# Altium PCB NEw.PcbDoc
Units mil, origin at the board's own origin, x right, y up, seen from the top; angles counter-clockwise.
Board outline 6000 x 4000 mil, 2 copper layers (Top Layer, Bottom Layer); 14 components, 8 nets, 33 pads, 0 vias.
Unrouted connection lines stored in the file: 24.
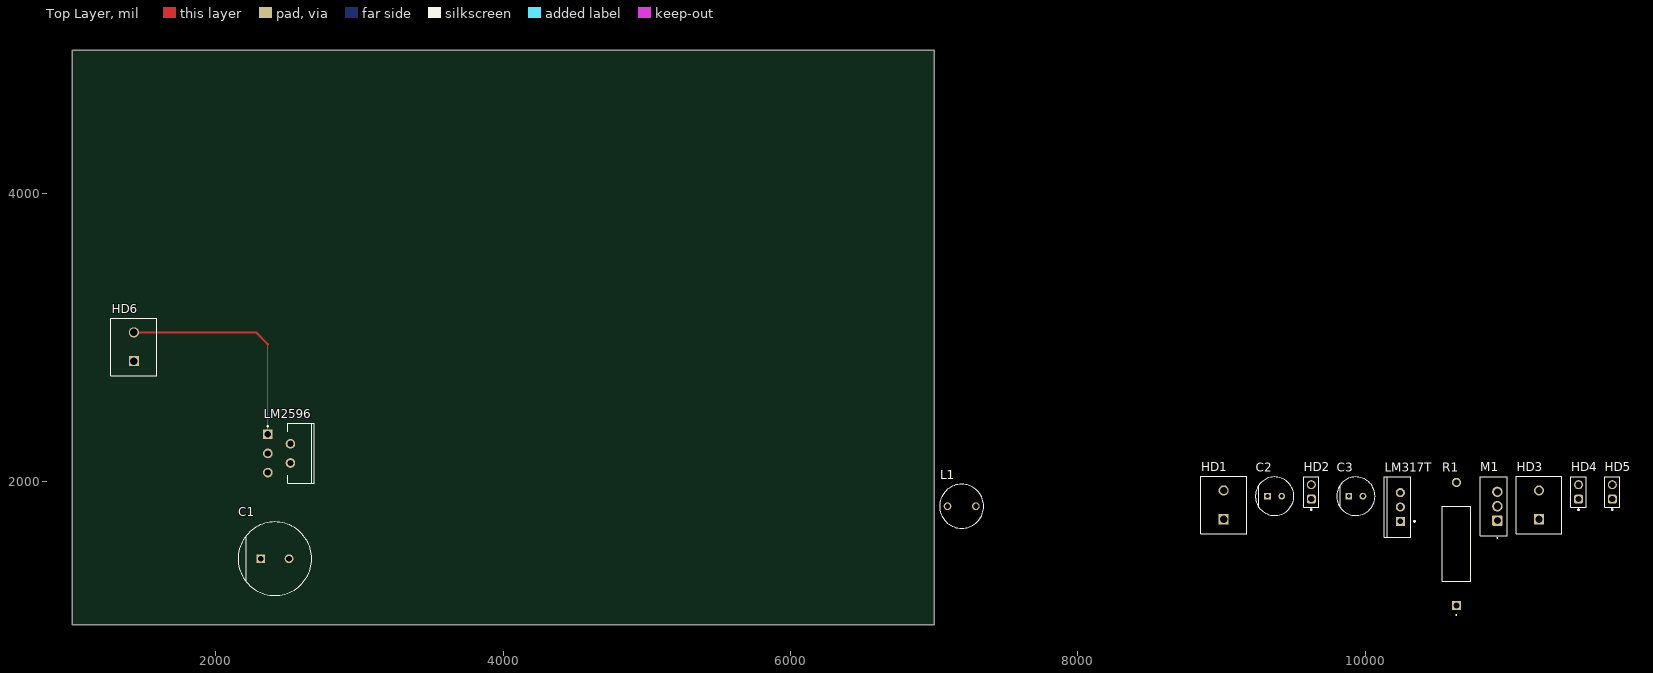
[diagram p0: Top Layer view]
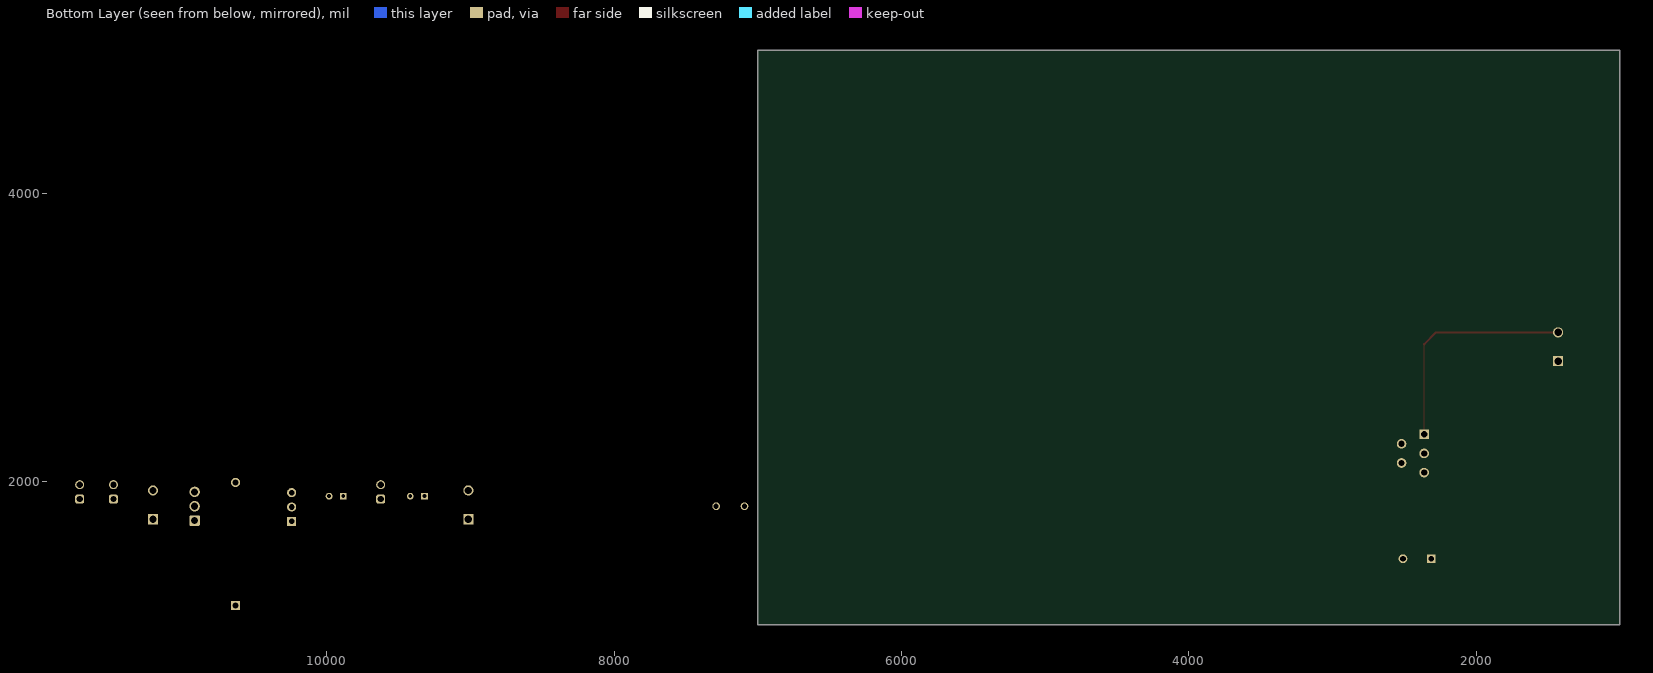
[diagram p1: Bottom Layer view, seen from below]

## Layer stack, top to bottom
Top Solder: solder mask 0.4, Solder Resist, Dk 3.5
Top Layer: signal copper 1.4
Dielectric 1: dielectric 12.6, FR-4, Dk 4.8
Bottom Layer: signal copper 1.4
Bottom Solder: solder mask 0.4, Solder Resist, Dk 3.5

## Board outline
1000,1000 7000,1000 7000,5000 1000,5000

## Design rules (kind name [scope] priority, off if disabled: settings)
Clearance [All] p1: gap=10 ignorepadtopadclearanceinfootprint=FALSE
PolygonConnect [All] p1: connectstyle=Relief reliefconductorwidth=10 reliefentries=4 polygonreliefangle="90 Angle" airgapwidth=10
RoutingVias [All] p1: holewidth=28 width=50 viastyle="Through Hole" minholewidth=28 minwidth=50 maxholewidth=28 maxwidth=50
SolderMaskExpansion [All] p1: expansion=4 istentingtop=FALSE
SupplyNets "Schematic Supply Nets" [InNet('GND')] p1: voltage=0.000
Width [All] p1: maxlimit=150 minlimit=0.13 preferedwidth=10
30 further rules are at their usual default settings.

## Components (designator, comment, footprint, x,y, rotation, side; value= is the part's Value field where it differs from the comment)
C1 "EEUFR1H681L" FP-RAD-TH-D_12_5_0_5-L_30-MFG 2411.57,1460 r0 top
C2 "EEUFR1E101B" FP-RAD-TH-D_6_3_0_5-L_11-MFG 9370,1895 r0 top
C3 "EEUFR1E101B" FP-RAD-TH-D_6_3_0_5-L_11-MFG 9935,1895 r0 top
HD1 "1729128" PHOE-1729128-2_V 9015,1835 r90 top
HD2 "61300211121" 61300211121 9625,1925 r90 top
HD3 "1729128" PHOE-1729128-2_V 11210,1835 r90 top
HD4 "61300211121" 61300211121 11485,1925 r90 top
HD5 "61300211121" 61300211121 11720,1925 r90 top
HD6 "1729128" PHOE-1729128-2_V 1430,2935 r90 top
L1 "744772390" WE-TI-L 7191.57,1825 r0 top
LM317T "LM317T/NOPB" NDE0003A 10245,1820 r90 top
LM2596 "LM2596T-ADJ/NOPB" NDH0005A 2440.94,2192.91 r270 top
M1 "2SK2927-E" SIP444W76P254L1016H2199Q3_PRSS0004AC-A_N 10895,1825 r90 top
R1 "AC03000003008JAC00" RES_AC03_VIS 10635,1135 r90 top

## Footprints (in the part's own frame and the unit in brackets; to place one, negate y for a bottom-side part, rotate by r counter-clockwise, add the part's x,y. Pads: shape width x height; smd on the part's side, far side on the other; paste and mask are expansions set on the pad)
61300211121 [mm] "Pin Header, pitch 2.54 mm, THT, Vertical, single row, 2p"
  rrect50% 1.6x1.6 hole 1.1: 1(-1.27,0)
  round 1.6 hole 1.1: 2(1.27,0)
  silkscreen extent -3.26,-1.35 2.69,1.35, body extent -2.54,-1.27 2.54,1.27, height 8.57
FP-RAD-TH-D_6_3_0_5-L_11-MFG [mm]
  rect 1.2x1.2 hole 0.7 paste-2539.97 mask+0: 1(-1.25,0)
  round 1.2 hole 0.7 paste-2539.97 mask+0: 2(1.25,0)
  silkscreen extent -3.4,-3.4 3.4,3.4, body extent -3.5,-3.5 3.5,3.5, height 0.25
FP-RAD-TH-D_12_5_0_5-L_30-MFG [mm]
  rect 1.55x1.55 hole 1 paste-2539.97 mask+0: 1(-2.5,0)
  round 1.55 hole 1 paste-2539.97 mask+0: 2(2.5,0)
  silkscreen extent -6.5,-6.5 6.5,6.5, body extent -6.6,-6.6 6.6,6.6, height 0.25
NDE0003A [mm] "FM, 3-Leads, Body 10.7x4.7mm, Pitch 2.54mm"
  rect 1.6x1.6 hole 1: 1(-2.54,0)
  round 1.6 hole 1: 2(0,0) 3(2.54,0)
  silkscreen extent -5.35,-2.63 5.35,2.85, body extent -5.4,-1.9 5.4,2.9, height 19.4
NDH0005A [mm] "FM, 5-Leads, Body 10.6x4.7mm, Pitch 1.7mm"
  rect 1.7x1.7 hole 1.1: 1(-3.4,-2)
  round 1.7 hole 1.1: 2(-1.7,2) 3(0,-2) 4(1.7,2) 5(3.4,-2)
  silkscreen extent -5.3,-2.12 5.3,6.23, body extent -5.35,-2.31 5.35,6.28, height 21.1
PHOE-1729128-2_V [mm] "Receptacle, 2-Leads, Body 8.1x10.16mm, Pitch 5.08mm"
  rect 1.8x1.8 hole 1.3: 1(-2.54,0)
  round 1.8 hole 1.3: 2(2.54,0)
  silkscreen extent -5.08,-4.05 5.08,4.05, body extent -5.65,-4.05 5.08,4.05, height 10.01
RES_AC03_VIS [mil]
  rect 63x63 / inner round 60 / far side rect 63x63 hole 43 paste-99999 mask+0: 1(0,0)
  round 63 / inner round 60 / far side round 63 hole 43 paste-99999 mask+0: 2(856,0)
  silkscreen extent -69,-99 689,100, body extent -16,-95 873,95, height 189
SIP444W76P254L1016H2199Q3_PRSS0004AC-A_N [mm] "SIP, Body Width 4.44mm, Lead Width 0.76mm, Pitch 2.54mm, Body Length 10.16mm, Height 21.99mm, IPC Medium Density"
  rrect25% 1.85x1.85 hole 1.25: 1(-2.54,-0.63)
  round 1.85 hole 1.25: 2(0,-0.63) 3(2.54,-0.63)
  silkscreen extent -5.64,-2.38 5.24,2.38, body extent -5.43,-2.57 5.43,2.57, height 0.25
WE-TI-L [mm] "THT Inductor, 2-Leads, Body 7.8 x 7.8 mm"
  round 1.35 hole 0.9: 1(-2.5,0) 2(2.5,0)
  silkscreen extent -3.9,-3.9 3.9,3.9, body extent -3.9,-3.9 3.89,3.9, height 9.5

## Part data
C1: library part CMP-05427-000465-1, "Aluminum Electrolytic Capacitors (Radial Lead Type) 680uF ±20% 50V"
C2 C3: library part CMP-05427-000897-1, "Aluminum Electrolytic Capacitors (Radial Lead Type) 100uF ±20% 25V", Capacitance=100uF, Case/Package=Radial, ESR (Equivalent Series Resistance)=130mR, Max Operating Temperature=105°C, Min Operating Temperature=-40°C, Package Quantity=2000, Ripple Current=455mA, Tolerance=20%, Voltage Rating=25V, Diameter=6.3mm, Features="General Purpose", Height=11.2mm, Height - Seated (Max)=0.441inch, Impedance=130mR, Lead Diameter=0.5mm, Lead Free="Lead Free", Lead Pitch=5mm, Length=11.2mm, Life (Hours)=2000Hour, Mount="Through Hole", Packaging="Tape and Reel", Polarity=Polar, Radiation Hardening=No, RoHS Compliant=Yes, Series=FR, Termination=Radial, Voltage Rating (DC)=25V
HD1 HD3 HD6: library part CMP-2000-05815-1, "PCB Terminal Block, 13.5 A, 400 V, 2-Pin THD, RoHS, Bulk", Current Rating=13500mA, Manufacturer="Phoenix Contact", Package Description="2-Pin Through Hole Device, Body 8.1 x 10.16 mm, Pitch 5.08 mm", Package Reference=1729128-2, Package Version=03/2015, Voltage Rating=400V, Datasheet URL=https://datasheet.ciiva.com/16046/1729128-16046181.pdf, Datasheet Version=12/2013, Manufacturer URL=http://www.phoenixcontact.com/, Mounting Technology=ThroughHole, No. of Positions=2, No. of Rows=1, Orientation=Horizontal, Package URL=https://www.phoenixcontact.com/online/portal/pi/pxc/product_detail_page/!ut/p/b1/3VdJjqNKFDxLH8AFycySyWY2ozFsEPOMMQaDOX1XedGL_1Vdm5YXJleknhSKeBkvI6EA8ncAo3AYoDhBQGco6KN7VURTdemj9us_IEKEZo_YHiPAEWEFmDGOHMORkqKYCORBZxgL7ZoaZYcbFFUZ3fqxSY6GOuxydWUuHqz1ynmMFygu583Bob0Ewr6Sd_l-5m-kAueHiB0jpRwZwe58wwtkpxtMYd_LmGcDRU02dRNEyWt6Y2ti5pSyJ_reIkzIulrqApdnbT11V5jnCKbYNCvhEM1MCpPByat_X379-iThf08CI5GfOPqfBeS3BRoBOdD55AKVv0iLwCMq-2BrzXWSGRH7pUGD9uwXQjiph3xL0DKQwdGa0JImiIOmBNOestqgwTHSSs2oOep-78apyXQBvNi8ZLaFjvjWvcaUEBu0MC6Wbe-d6mB0FAebo2lUWinqYaZs5DAYzV0RP9yitUjnGJ0iI9xhZkT42OCQNUJJhkgWINNQLP2JFP6OpMg3JCVg70jqHT0lvKOnhHf0lPuOnnLf0VPuWx6_dxwUIvwk5WMkT0kLL1mh61l2yZVSzG3pYV_bqo-mj6uMKwKwdnnW8Jh5RTOJzMOA5c-eJDaZQw4mTMPH02PvS_ZAqNVjVTo2WyYLkwH_KU1mmmG5kjRhDqPXLwwVHvVOjCM60-fpXvTDfMGW1PVFVS1r4e4yVDk4ZdNbkUHvqPqQSeian4UD39fNKmachqdJ1NJbyk8rXT9mXTvPk3oE5meulKGgiruPJek-4I9hTT6G8ZLOyRSm2RRVbThERQad5OS28hdt4YW4vG0stgYYzsWsK4_7y6DZMjJSCqri1kyiZR5vD7pwIrNR7QwPHTcLTI5qT7eRlpHrdGiupYlqQDJ7zy_CND8fWWBoLRXxk1RVcXiBQwbTD4Xi7KL-FuO94t9xaqweXzH, Packing=Bulk, PartNumber=1729128, Pitch=5.08mm, RoHS=TRUE
HD2 HD4 HD5: library part CMP-1712-00002-6, Color=Black, Contact Resistance=20mΩ, Current Rating=3A, Max Operating Temperature=125°C, Min Operating Temperature=-40°C, Operating Supply Voltage=250V, Connector Type="Male Pin", Contact Gender=Male, Contact Material=Copper, Contact Mating Length=5.9944mm, Contact Plating=Gold, Gender=Male, Height=8.94mm, Housing Material=PBT, Lead Free="Lead Free", Lead Pitch=2.54mm, Mount="Through Hole", NexarPartId=20081794, Number of Contacts=2, Number of Pins=2, Number of Positions=2, Number of Rows=1, Orientation=Vertical, Packaging=Bulk, Pitch=2.54mm, REACH SVHC="No SVHC", RoHS=Compliant, Termination="Through Hole", Voltage Rating=250V
L1: library part CMP-0225-00043-1, "Radial Leaded Wire Wound Inductor WE-TI, L = 39.0 µH", Inductance="39.0 ÂµH", ComponentLink1Description="Manufacturer Link", ComponentLink1URL=http://www.we-online.com, ComponentLink2Description=Datasheet, ComponentLink2URL=http://www.we-online.de/katalog/media/pdf/744772390.pdf, DatasheetVersion="ver 8, Oct-2009", PackageDescription="THT Inductor, 2-Leads, Body 7.8 x 7.8 mm", PackageReference=WE-TI-L, PackageVersion=2006
LM317T: library part CMP-0062-02455-3, "3-Terminal Adjustable Regulator, 3-pin TO-220, Pb-Free", Manufacturer="Texas Instruments", PackageTopMarking="NSUZXYTTE#*LM317T P+", PowerWise=N, ComponentLink1Description="Datasheet URL", ComponentLink1URL=http://www.ti.com/general/docs/lit/getliterature.tsp?genericPartNumber=LM317-N&fileType=pdf, CompType="LDO IC", PackageDescription="TO-220, Molded, 3 Lead, Straight", PackageReference=NDE0003A, PinCount=3, RoHS=Y
LM2596: library part CMP-0069-01928-3, "SIMPLE SWITCHER® Power Converter 150 KHz 3A Step-Down Voltage Regulator, 5-pin TO-220, Pb-Free", Manufacturer="Texas Instruments", PackageTopMarking="NSUZXYTTE#*LM2596T*-ADJ P+", PowerWise=N, ComponentLink1Description="Datasheet URL", ComponentLink1URL=http://www.ti.com/general/docs/lit/getliterature.tsp?genericPartNumber=LM2596&fileType=pdf, CompType=Switcher, PackageDescription="TO-220, Molded, Stagger Bend, 5 Lead", PackageReference=NDH0005A, PinCount=5, RoHS=Y
M1: library part CMP-00572-23028033-1, "Trans MOSFET N-CH Si 60V 10A 3-Pin(3+Tab) TO-220AB Tube", Case/Package=TO-220AB, Continuous Drain Current (ID)=10A, Drain to Source Voltage (Vdss)=60V, Gate to Source Voltage (Vgs)=20V, Manufacturer Lifecycle Status="NOT RECOMMENDED FOR NEW DESIGNS", Max Operating Temperature=150°C, Min Operating Temperature=-55°C, Power Dissipation=30W, China RoHS=Compliant, ComponentLink1Description="Manufacturer's Website", ComponentLink1URL=http://www.renesas.com, ComponentLink2Description="Datasheet URL", ComponentLink2URL=https://octopart.com/cad-content/api/get-model-datasheet/15189/23028033, ComponentLink3Description="Manufacturer's Package Drawing", ComponentLink3URL=https://www.renesas.com/en/document/psc/package-drawing-220ab-4pin-prss0004ac, Fall Time=70ns, Height=4.64mm, HelpURL=https://octopart.com/cad-content/api/get-model-datasheet/15189/23028033, Lead Free="Lead Free", Lifecycle Status=NRND, Mount="Through Hole", Number of Elements=1, Number of Pins=3, Radiation Hardening=No, Rds On Max=75mΩ, Rise Time=55ns, RoHS=Compliant, Turn-Off Delay Time=60ns, Turn-On Delay Time=10ns
R1: library part CMP-00030-39747180-1, "AC03000003008JAC00 Resistor, 3 Ohm, ± 5%, 3 W, Axial Leaded, Wirewound, General Purpose", Case/Package=Axial, Max Operating Temperature=275°C, Max Power Dissipation=3W, Min Operating Temperature=-40°C, Resistance=3Ω, Temperature Coefficient=-80ppm/°C, Tolerance=5%, Voltage Rating=3V, Composition=Wirewound, Contact Plating=Tin, Diameter=4.8mm, Features="Flame Retardant Coating", Lead Diameter=800µm, Length=13mm, NexarPartId=39747180, Number of Pins=2, Number of Terminations=2, Packaging="Tape & Box (TB)", Power Rating=3W, Radiation Hardening=No, REACH SVHC=Unknown, RoHS=Compliant, Schedule B="8533210080, 8533210080", Termination=Axial, Thickness=4.8006mm, Voltage Rating (DC)=3V, Width=4.8mm

## Nets (pads, with @x,y where several pads share a name; then routed paths per layer and width w, separated by ;. In a path a pad name is that pad's centre, name@x,y a point inside that pad or via, vN(x,y) a via of type N, cw(c..) or ccw(c..) an arc to the next point about the centre after c; other vN are vias at no path point)
GND: C1.1 C2.1 C3.1 HD1.2 HD3.2 HD4.2 HD5.2 HD6.1 LM2596.3 LM2596.5
NetC1_2: C1.2 HD4.1 HD5.1 HD6.2 LM317T.3 LM2596.1 | length 1592.3
  Top Layer w3.81: LM2596.1 2362.2,2952.76
  Top Layer w15: HD6.2 2279.96,3035 2362.2,2952.76
NetC2_2: C2.2 HD1.1 L1.2 LM2596.4
NetC3_2: C3.2 HD3.1 M1.3
NetHD2_1: HD2.1 HD2.2 M1.1
NetL1_1: L1.1 LM2596.2
NetLM317T_1: LM317T.1 M1.2 R1.2
NetLM317T_2: LM317T.2 R1.1